# Altium PCB INTEGRATED_PCB.PcbDoc
Units mil, origin at the board's own origin, x right, y up, seen from the top; angles counter-clockwise.
Board outline 1950 x 1790 mil, 4 copper layers (Top Layer, Int1, Int2, Bottom Layer), stack 40.334 mil thick; 97 components, 58 nets, 228 pads, 294 vias.
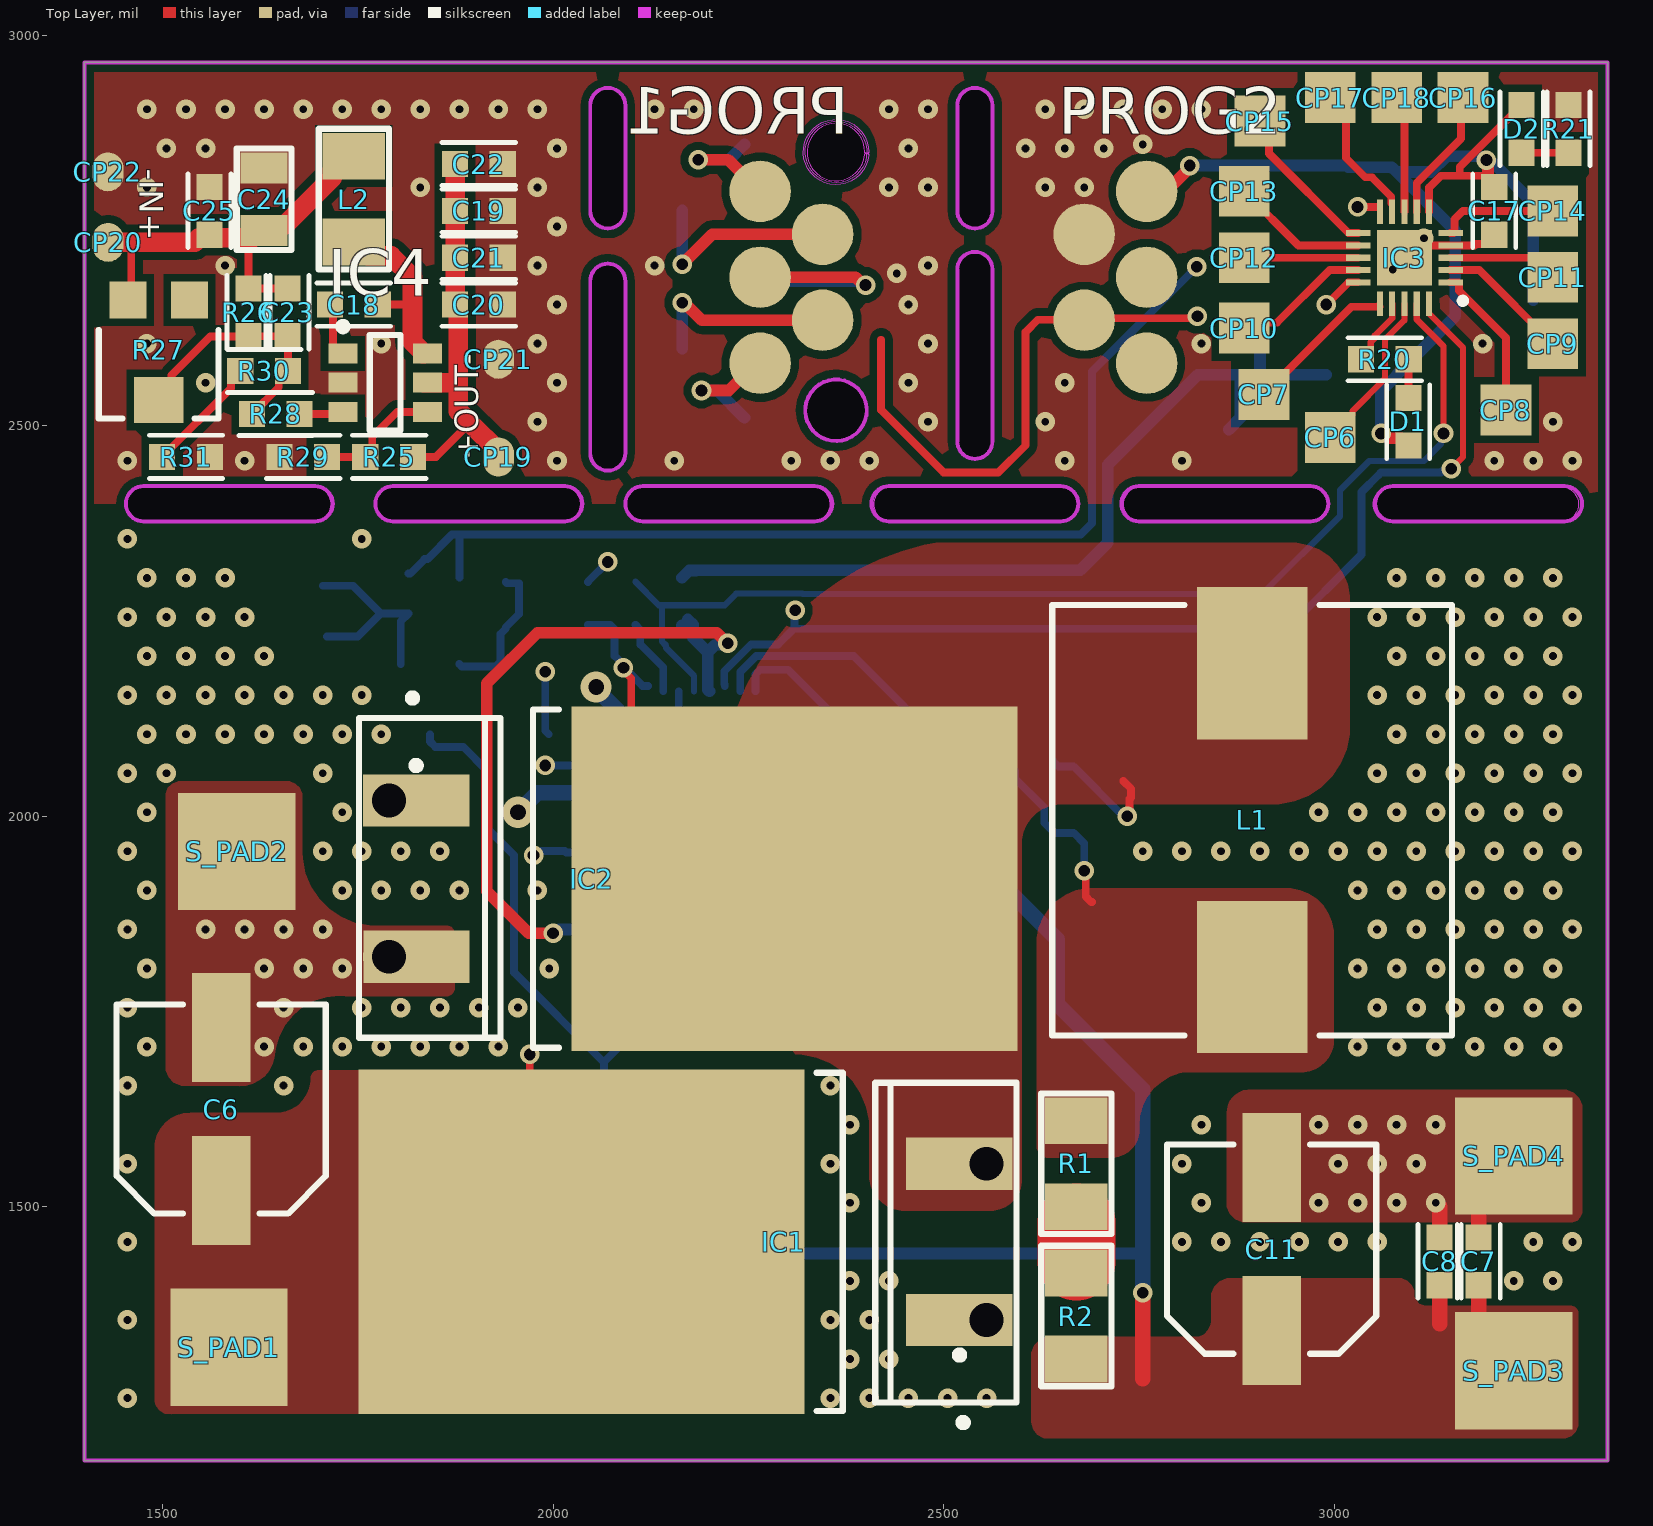
[diagram p0: Top Layer view]
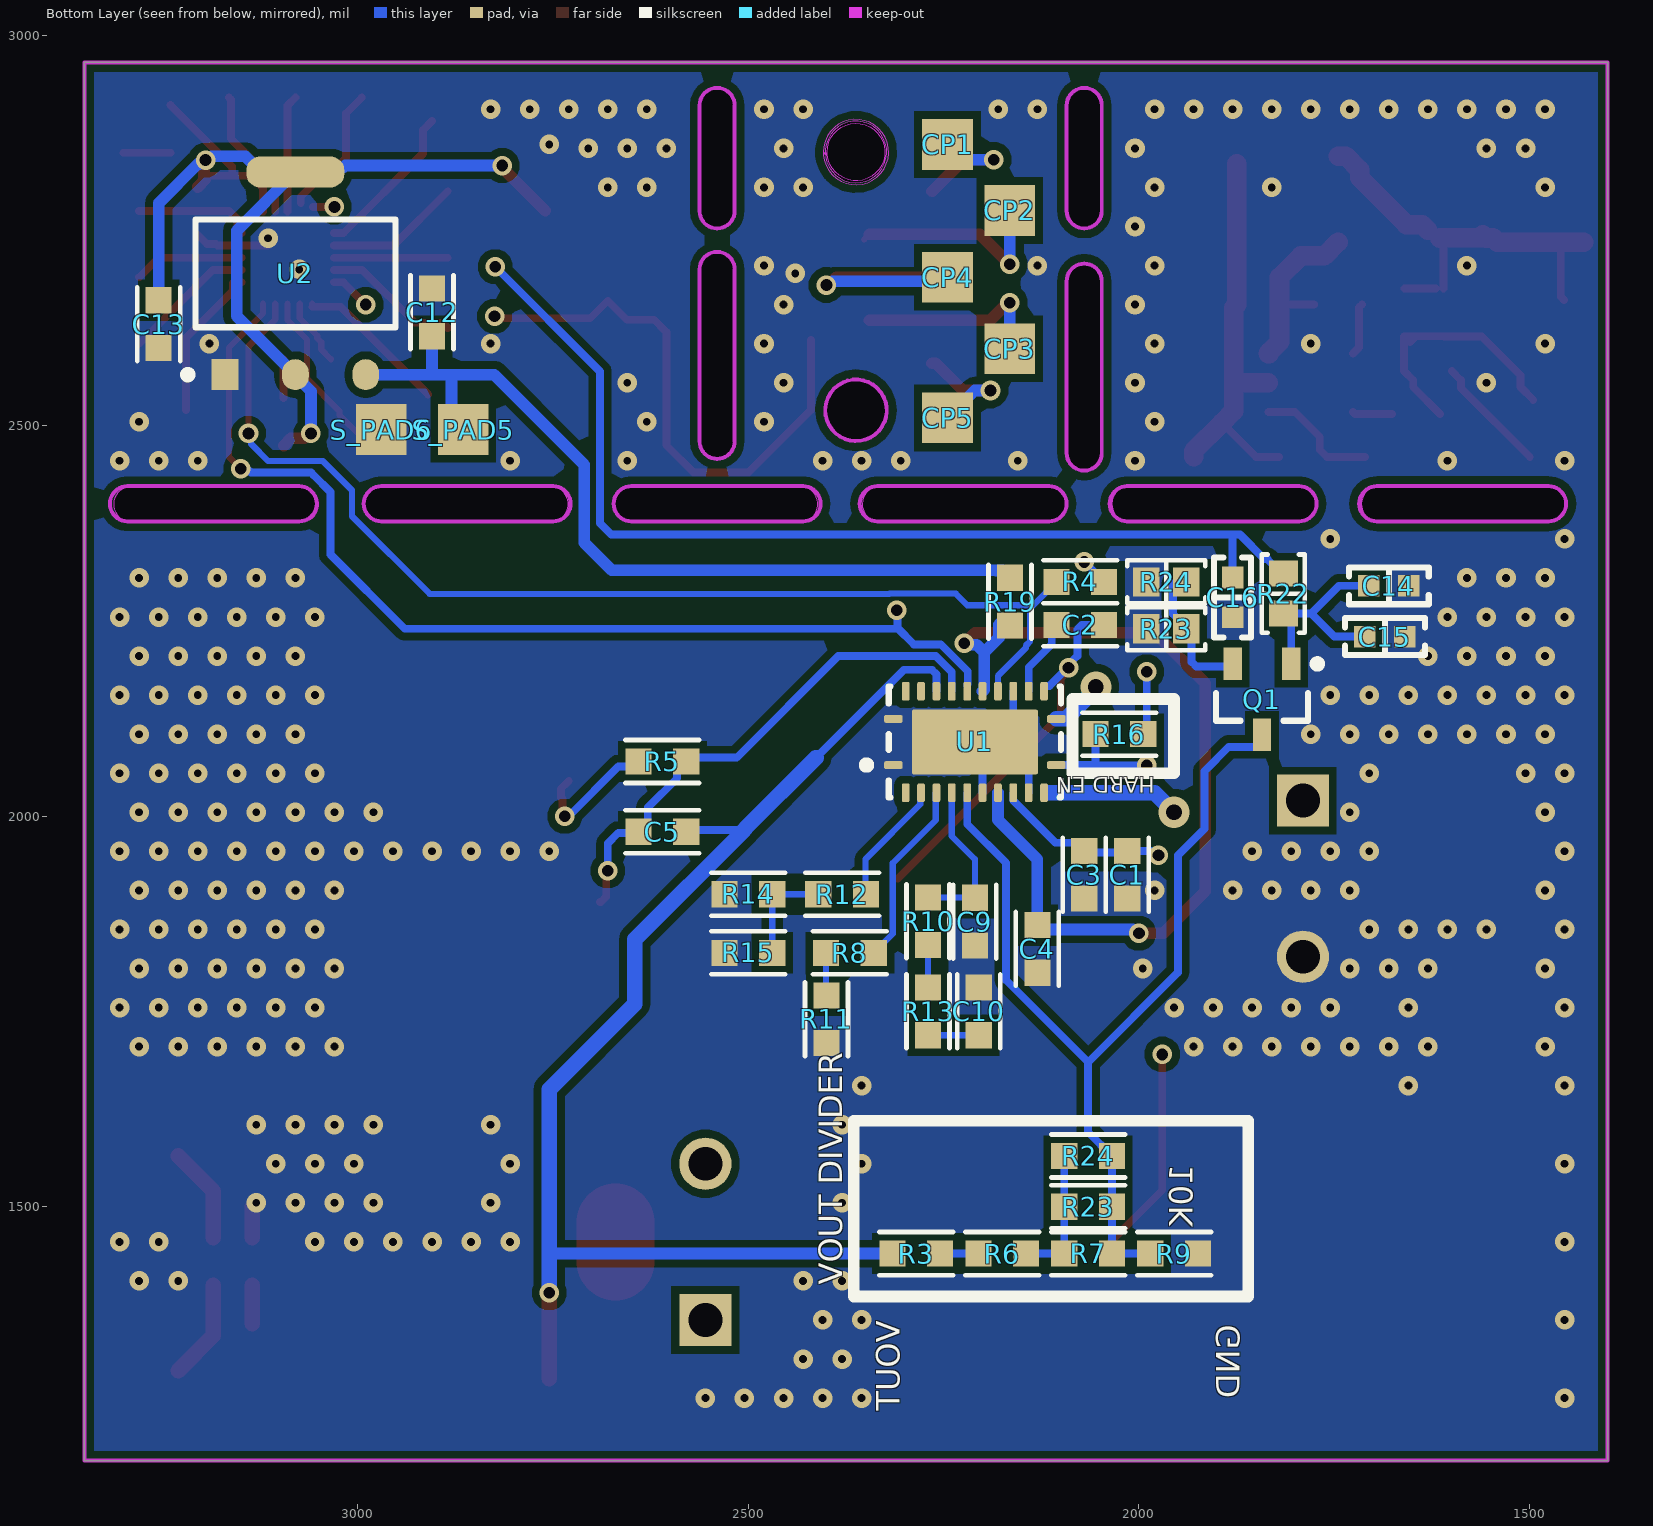
[diagram p1: Bottom Layer view, seen from below]
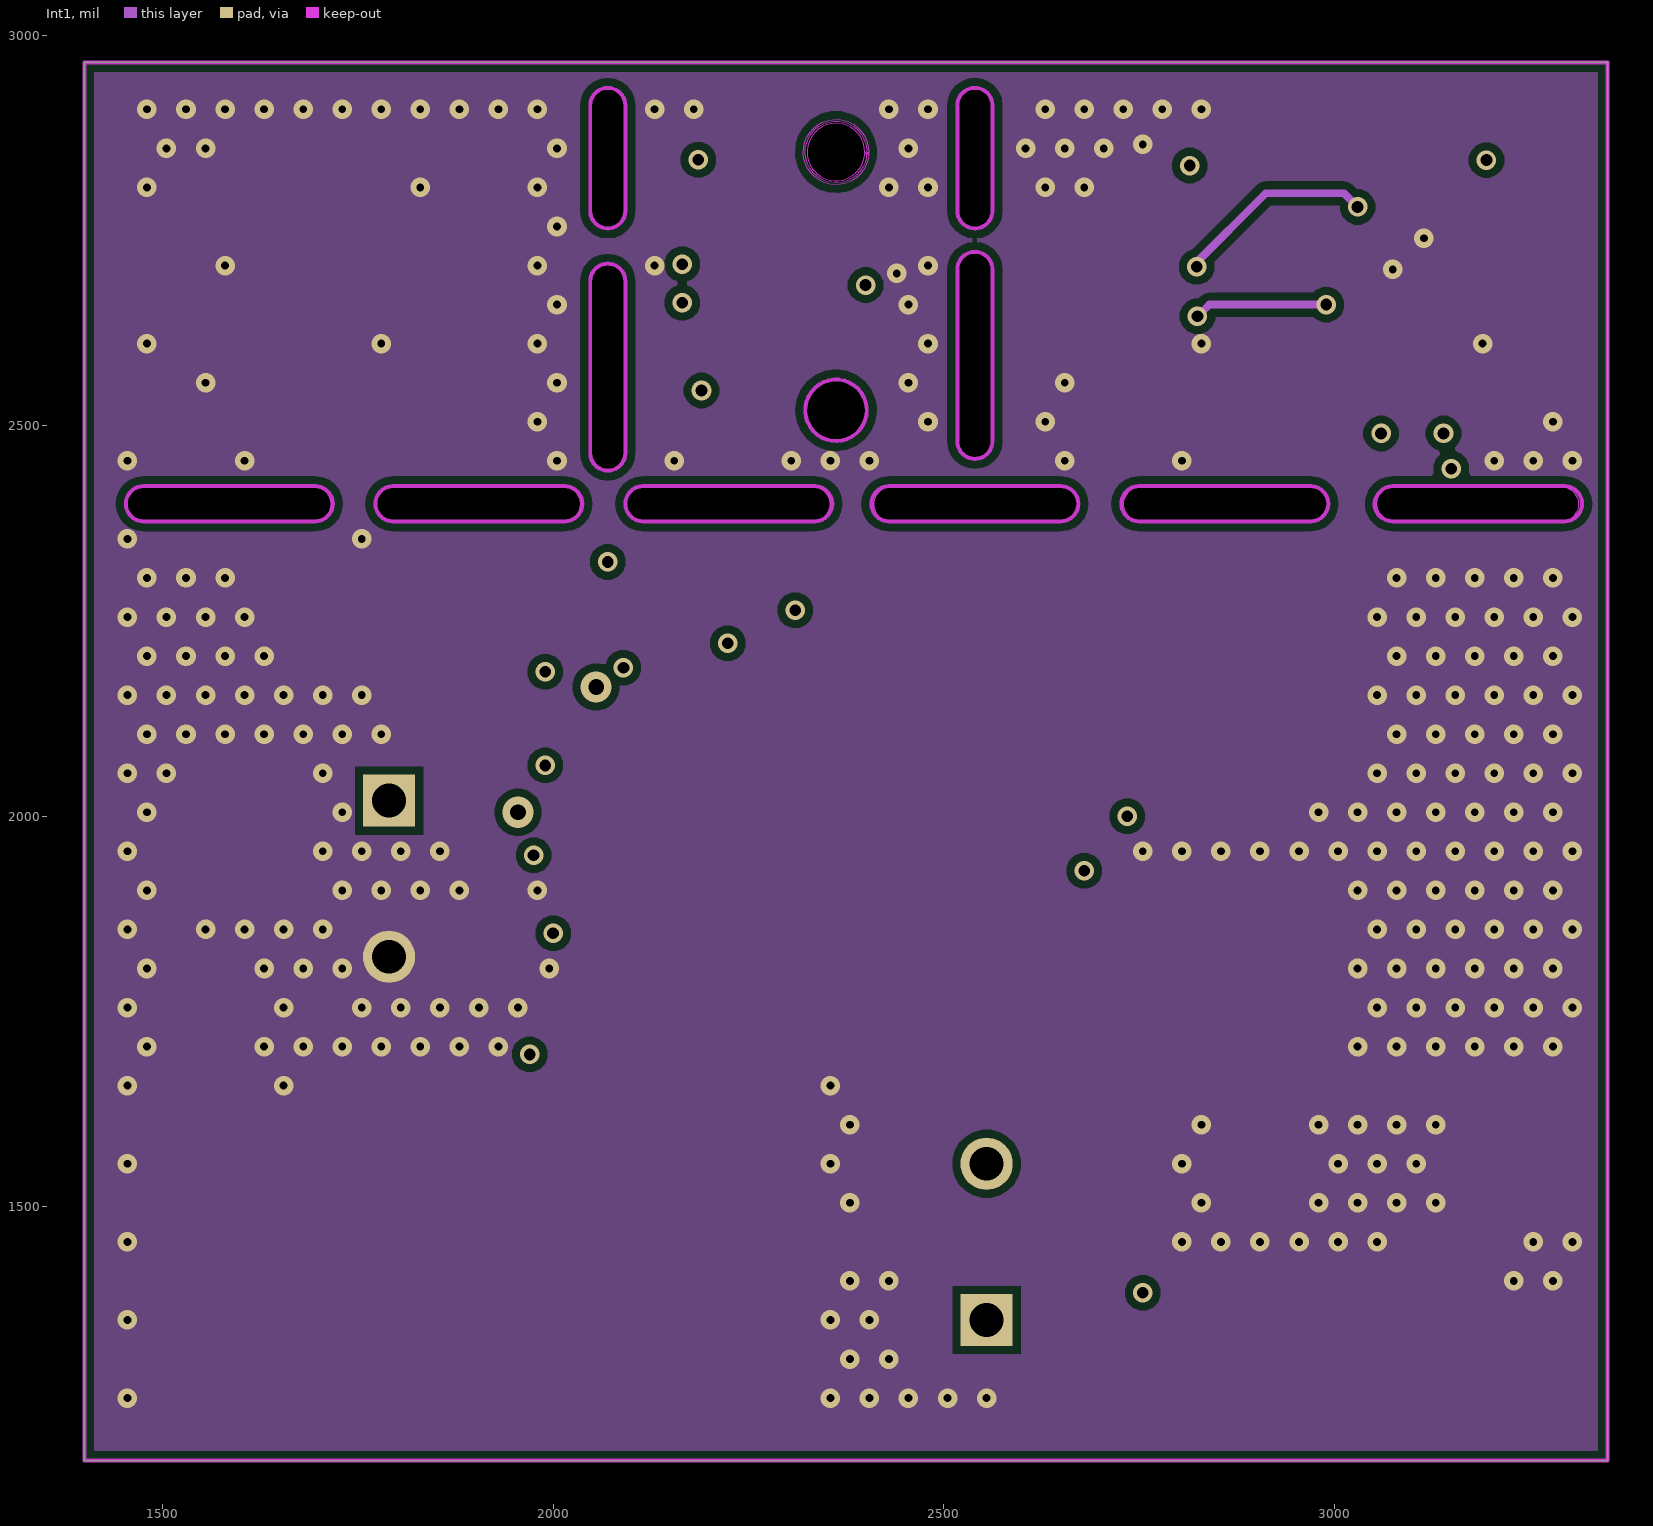
[diagram p2: Int1]
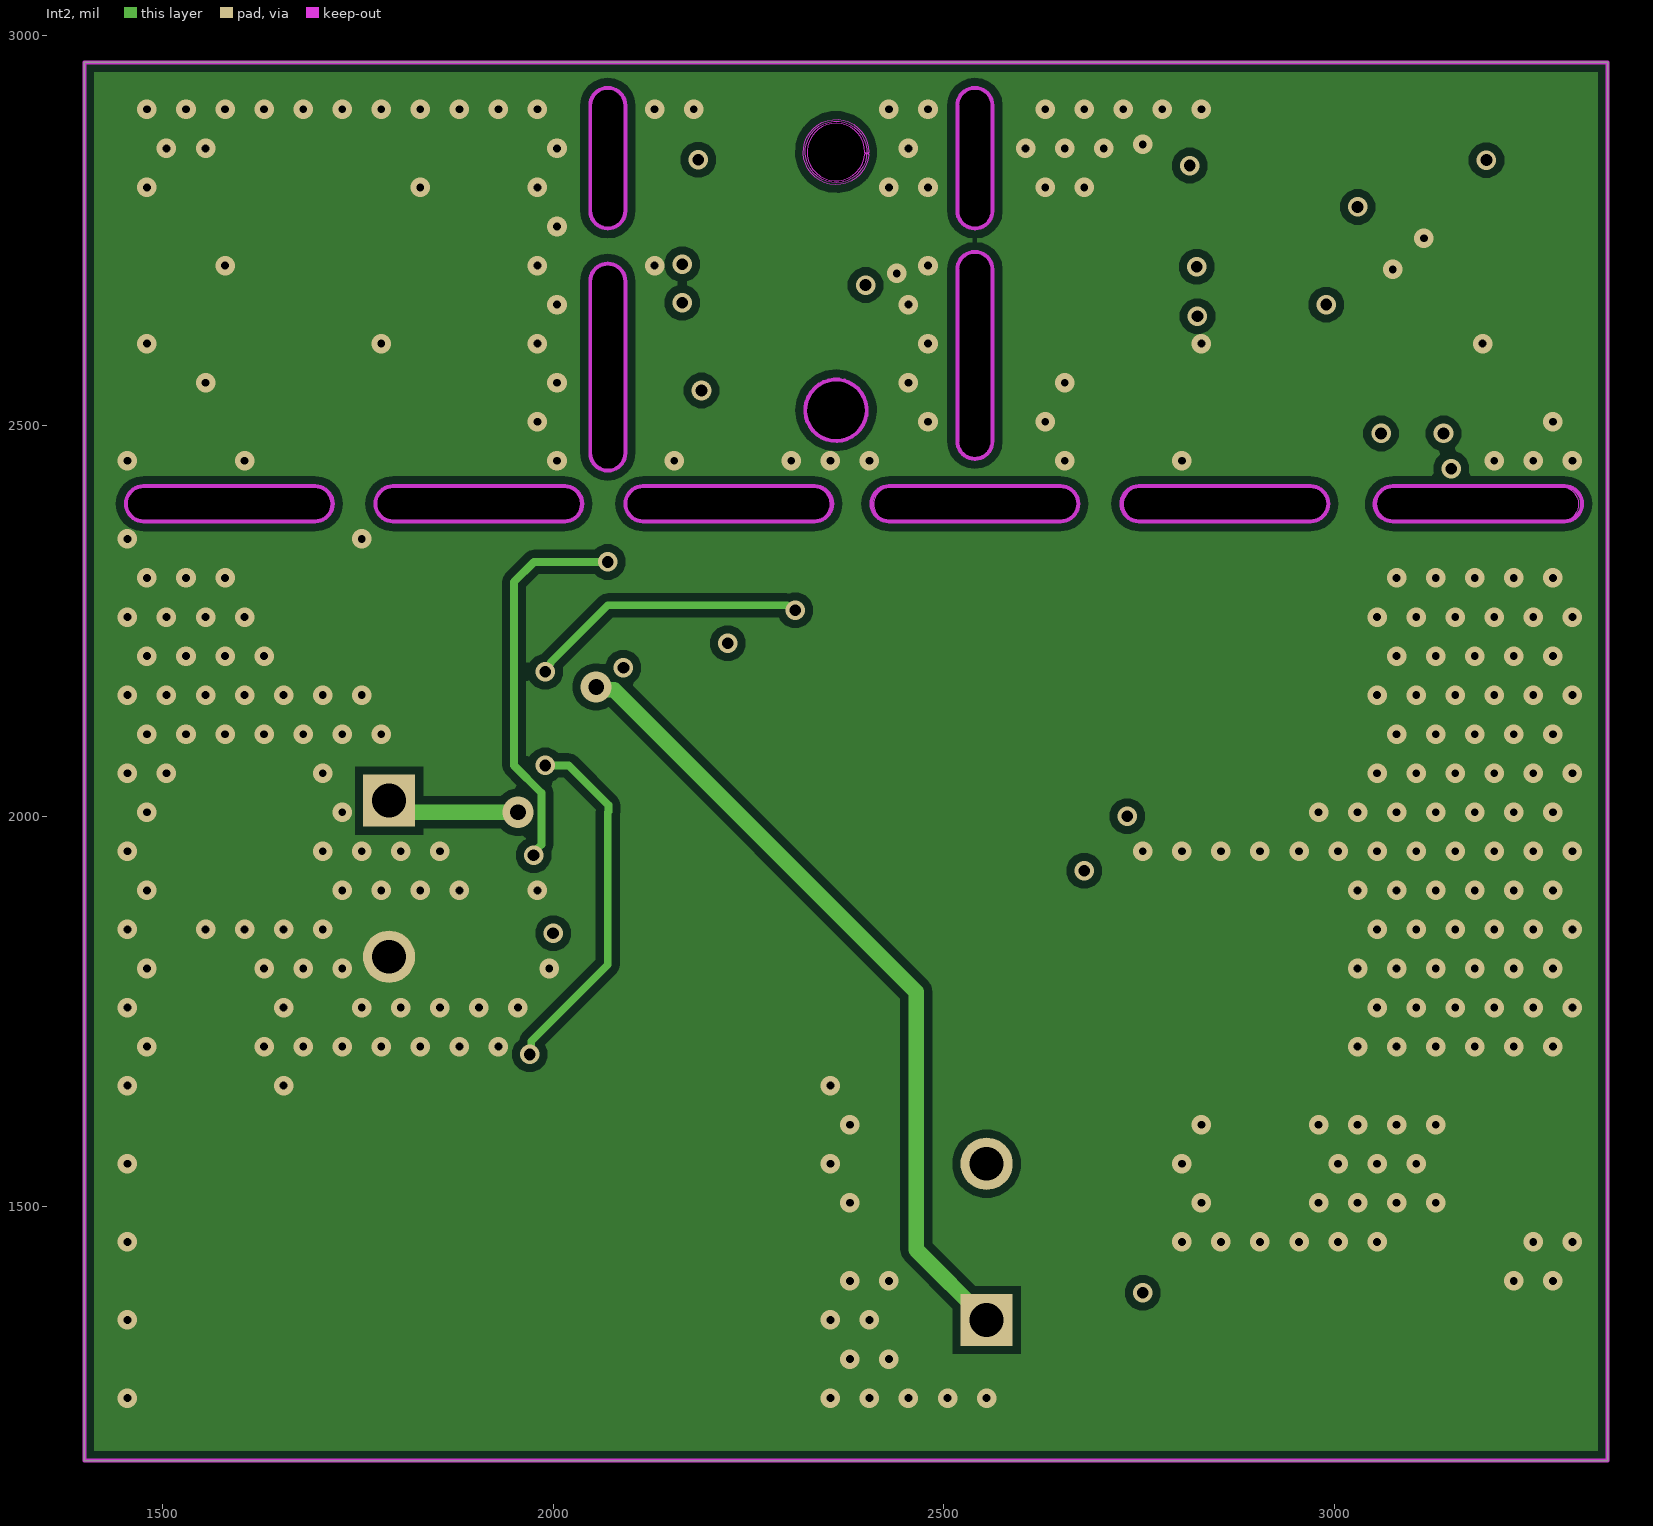
[diagram p3: Int2]
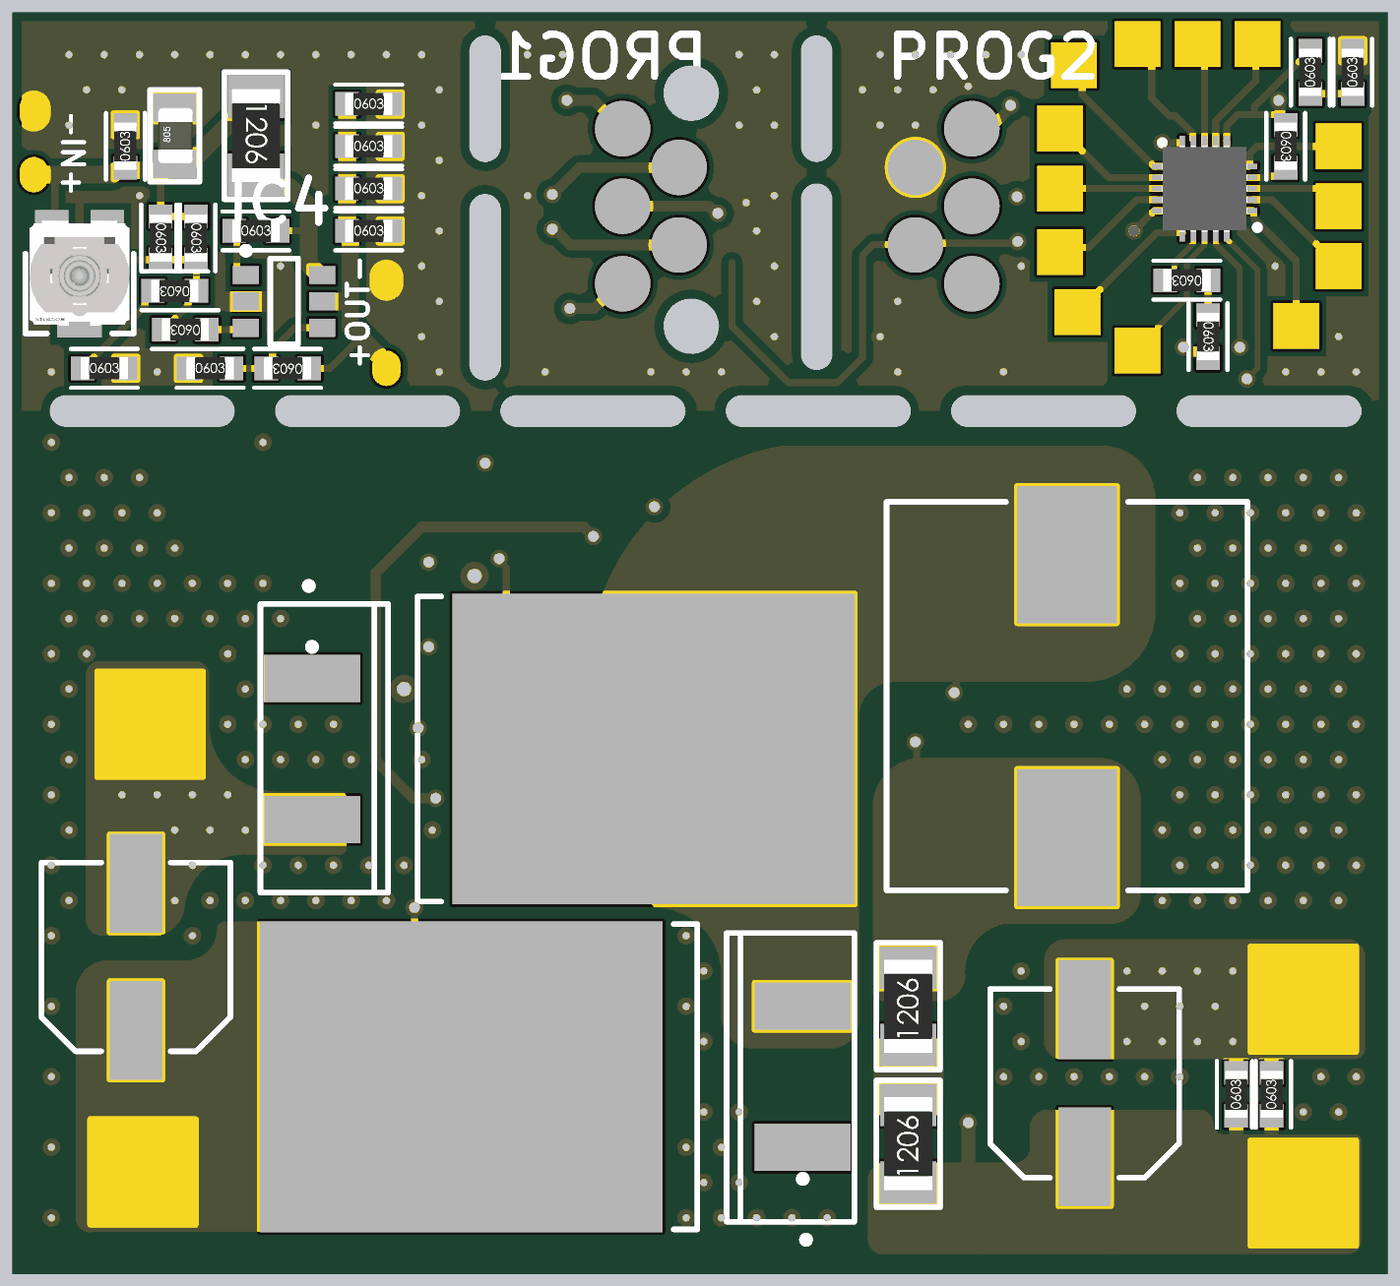
[diagram p4: 3D render of the assembled board from above, using the file's embedded part models]
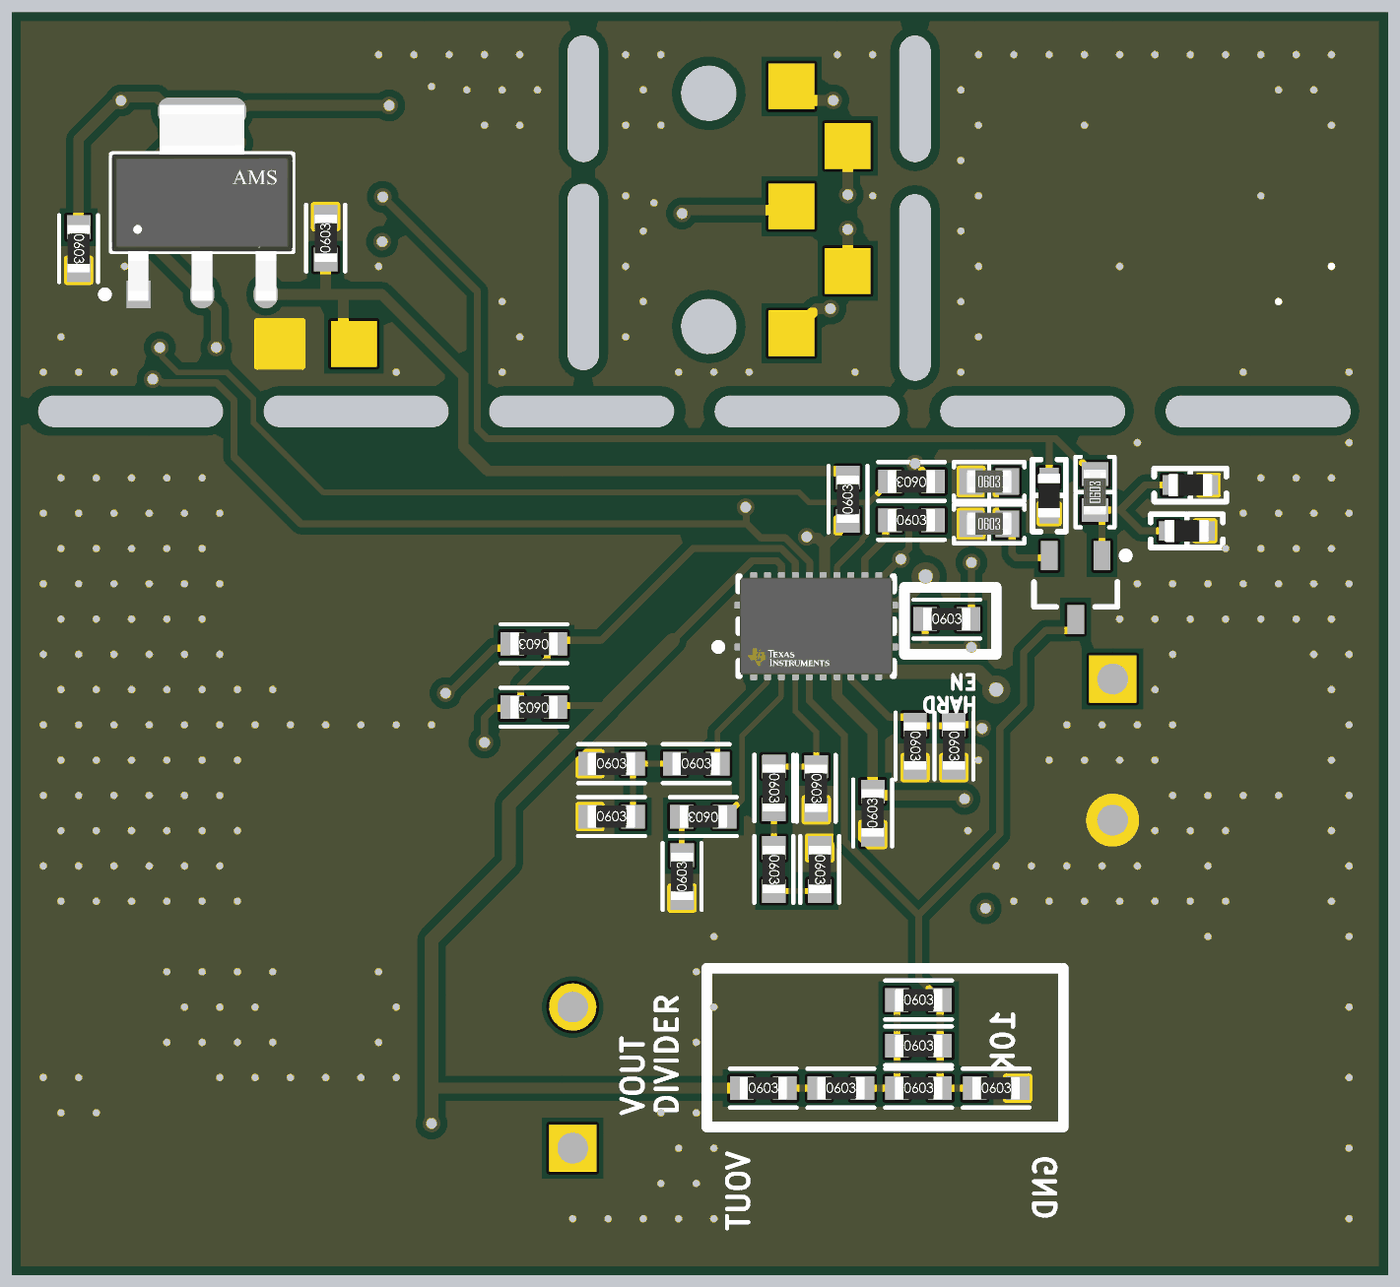
[diagram p5: 3D render of the assembled board from below, using the file's embedded part models]

## Layer stack, top to bottom
Top Solder: solder mask 1, SM-001, Dk 4
Top Layer: signal copper 1.378
Dielectric 1: prepreg 8.26, PP-017, Dk 4.3
Int1: signal copper 0.689
Dielectric 3: core 19.68, Core-039, Dk 4.8
Int2: signal copper 0.689
Dielectric 5: prepreg 8.26, PP-017, Dk 4.3
Bottom Layer: signal copper 1.378
Bottom Solder: solder mask 1, SM-001, Dk 4

## Board outline
1400,1175 1400,2965 3350,2965 3350,1175
cut-out: 2401.57,2850.64 cw(c2362.2,2850.32) 2401.41,2853.88 cw(c2401.41,2853.72) 2401.57,2853.72
cut-out: 2401.57,2520.01 cw(c2362.2,2519.68) 2401.41,2523.25 cw(c2401.41,2523.09) 2401.57,2523.09
cut-out: 2517.5,2910 cw(c2540,2910) 2540,2932.5 cw(c2540,2910) 2562.5,2910 2562.5,2775 cw(c2540,2775) 2540,2752.5 cw(c2540,2775) 2517.5,2775
cut-out: 2517.5,2480 ccw(c2540,2480) 2540,2457.5 ccw(c2540,2480) 2562.5,2480 2562.5,2700 ccw(c2540,2700) 2540,2722.5 ccw(c2540,2700) 2517.5,2700
cut-out: 2070,2752.5 cw(c2070,2775) 2047.5,2775 2047.5,2910 cw(c2070,2910) 2070,2932.5 cw(c2070,2910) 2092.5,2910 2092.5,2775 cw(c2070,2775)
cut-out: 2070,2442.5 cw(c2070,2465) 2047.5,2465 2047.5,2685 cw(c2070,2685) 2070,2707.5 cw(c2070,2685) 2092.5,2685 2092.5,2465 cw(c2070,2465)
cut-out: 1475,2376.98 cw(c1475,2399.48) 1475,2421.98 1690,2421.98 cw(c1692.5,2399.48) 1695,2376.98
cut-out: 1794.5,2376.98 cw(c1794.5,2399.48) 1794.5,2421.98 2009.5,2421.98 cw(c2012,2399.48) 2014.5,2376.98
cut-out: 3072.5,2376.98 cw(c3072.5,2399.48) 3072.5,2421.98 3287.5,2421.98 cw(c3290,2399.48) 3292.5,2376.98
cut-out: 2753,2376.98 cw(c2753,2399.48) 2753,2421.98 2968,2421.98 cw(c2970.5,2399.48) 2973,2376.98
cut-out: 2114,2376.98 cw(c2114,2399.48) 2114,2421.98 2329,2421.98 cw(c2331.5,2399.48) 2334,2376.98
cut-out: 2433.5,2376.98 cw(c2433.5,2399.48) 2433.5,2421.98 2648.5,2421.98 cw(c2651,2399.48) 2653.5,2376.98

## Design rules (kind name [scope] priority, off if disabled: settings)
Clearance [All] p1: gap=10 ignorepadtopadclearanceinfootprint=FALSE except(5: Arc-Arc Arc-Track Arc-SMDPad Arc-THPad Arc-Via Arc-Hole Track-Track Track-SMDPad Track-THPad Track-Via Track-Hole SMDPad-SMDPad SMDPad-THPad SMDPad-Via SMDPad-Hole THPad-THPad THPad-Via THPad-Hole Via-Hole Fill-Hole Poly-Hole Region-Hole Text-Hole)
MinimumSolderMaskSliver [All] p1: minsoldermaskwidth=4
PolygonConnect PolygonConnect_1 [(InNet('GND') AND HasFootprint('PCBCOMPONENT_1'))] p1: connectstyle=Relief reliefconductorwidth=20 reliefentries=4 polygonreliefangle="90 Angle" airgapwidth=10
PolygonConnect [All] p2: connectstyle=Direct reliefconductorwidth=10 reliefentries=4 polygonreliefangle="90 Angle" airgapwidth=10
RoutingVias [All] p1: holewidth=15 width=18 viastyle="Through Hole" minholewidth=12 minwidth=16 maxholewidth=40 maxwidth=50
SilkToSilkClearance [All] p1: silktosilkclearance=2
SilkToSolderMaskClearance [IsPad] p1: minsilkscreentomaskgap=4 clearancetoexposedcopper=TRUE
SolderMaskExpansion [All] p1: expansion=4 istentingtop=FALSE
SupplyNets "Schematic Supply Nets_3" [InNet('3V3')] p1: voltage=0.000
SupplyNets "Schematic Supply Nets_2" [InNet('VOUT')] p2: voltage=0.000
SupplyNets "Schematic Supply Nets_1" [InNet('VIN')] p3: voltage=0.000
SupplyNets "Schematic Supply Nets" [InNet('GND')] p4: voltage=0.000
UnRoutedNet [All] p1: checkbadconnections=TRUE
Width [All] p1: maxlimit=200 minlimit=5 preferedwidth=10 minimp=50.000000 maximp=50.000000 favimp=50.000000
26 further rules are at their usual default settings.

## Classes and differential pairs
component class Designator: C18 C19 C20 C21 C22 C23 C24 C25 CP19 CP20 CP21 CP22 IC2 L2 R25 R26 R27 R28 R29 R30 R31
component class controller: C12 C13 C14 C15 C16 C17 CP1 CP2 CP3 CP4 CP5 CP6 CP7 CP8 CP9 CP10 CP11 CP12 CP13 CP14 CP15 CP16 CP17 CP18 D1 D2 IC1 PROG1 PROG2 Q1 R20 R21 R22 R23 R24 S_PAD5 S_PAD6 U2
component class COMBINED: R19
component class converter: C1 C2 C3 C4 C5 C6 C7 C8 C9 C10 C11 IC1 IC2 L1 R1 R2 R3 R4 R5 R6 R7 R8 R9 R10 R11 R12 R13 R14 R15 R16 R23 R24 S_PAD1 S_PAD2 S_PAD3 S_PAD4 U1

## Components (designator, comment, footprint, x,y, rotation, side; value= is the part's Value field where it differs from the comment)
C1 "Capacitor" SMD-0603-RES 2015,1925 r0 bottom value=1uF
C2 "Capacitor" SMD-0603-RES 2075,2245 r270 bottom value=1p
C3 "Capacitor" SMD-0603-RES 2070,1925 r0 bottom value=1uF
C4 "Capacitor" SMD-0603-RES 2130,1830 r180 bottom value=100nF
C5 "Capacitor" SMD-0603-RES 2610,1980 r90 bottom value=1p
C6 "150uF" CAPAE7266X80M 1575,1625 r90 top
C7 "Capacitor" SMD-0603-RES 3185,1430 r0 top value=10uF
C8 "Capacitor" SMD-0603-RES 3135,1430 r0 top value=10uF
C9 "Capacitor" SMD-0603-RES 2210,1865 r0 bottom value=56pF
C10 "Capacitor" SMD-0603-RES 2205,1750 r0 bottom value=2.2nF
C11 "150uF" CAPAE7266X80M 2920,1445.67 r90 top
C12 "Capacitor" SMD-0603-RES 2905,2645 r180 bottom value=10uF
C13 "Capacitor" SMD-0603-RES 3255,2630 r0 bottom value=10uF
C14 "Capacitor" "CAP FILM 0603_1608" 1680,2295 r0 bottom value=100n
C15 "Capacitor" "CAP FILM 0603_1608" 1685,2230 r0 bottom value=1u
C16 "Capacitor" "CAP FILM 0603_1608" 1880,2280 r90 bottom value=100n
C17 "Capacitor" SMD-0603-RES 3205,2775 r180 top value=10uF
C18 "Capacitor" SMD-0603-RES 1745,2655 r270 top value=100n
C19 "Capacitor" SMD-0603-RES 1905,2775 r270 top value=10uF
C20 "Capacitor" SMD-0603-RES 1905,2655 r270 top value=10uF
C21 "Capacitor" SMD-0603-RES 1905,2715 r270 top value=10uF
C22 "Capacitor" SMD-0603-RES 1905,2835 r270 top value=10uF
C23 "Capacitor" SMD-0603-RES 1660,2645 r180 top value=10pF
C24 "Capacitor" SMD-0805-RES 1630,2790 r0 top value=47uF
C25 "Capacitor" SMD-0603-RES 1560,2775 r0 top value=100nF
CP1 "CONNECT_PAD" PAD_SQUARE 2245,2860 r90 bottom
CP2 "CONNECT_PAD" PAD_SQUARE 2165.35,2775.59 r90 bottom
CP3 "CONNECT_PAD" PAD_SQUARE 2165.35,2598.43 r90 bottom
CP4 "CONNECT_PAD" PAD_SQUARE 2245,2690 r270 bottom
CP5 "CONNECT_PAD" PAD_SQUARE 2245,2510 r180 bottom
CP6 "CONNECT_PAD" PAD_SQUARE 2995,2485 r0 top
CP7 "CONNECT_PAD" PAD_SQUARE 2910,2540 r90 top
CP8 "CONNECT_PAD" PAD_SQUARE 3220,2520 r90 top
CP9 "CONNECT_PAD" PAD_SQUARE 3280,2605 r90 top
CP10 "CONNECT_PAD" PAD_SQUARE 2885,2625 r90 top
CP11 "CONNECT_PAD" PAD_SQUARE 3280,2690 r90 top
CP12 "CONNECT_PAD" PAD_SQUARE 2885,2715 r90 top
CP13 "CONNECT_PAD" PAD_SQUARE 2885,2800 r90 top
CP14 "CONNECT_PAD" PAD_SQUARE 3280,2775 r90 top
CP15 "CONNECT_PAD" PAD_SQUARE 2905,2890 r90 top
CP16 "CONNECT_PAD" PAD_SQUARE 3165,2920 r90 top
CP17 "CONNECT_PAD" PAD_SQUARE 2995,2920 r90 top
CP18 "CONNECT_PAD" PAD_SQUARE 3080,2920 r90 top
CP19 "CONNECT_PAD" ROUND_SMALL 1930,2460 r180 top
CP20 "CONNECT_PAD" ROUND_SMALL 1430.26,2734.74 r0 top
CP21 "CONNECT_PAD" ROUND_SMALL 1930,2585 r0 top
CP22 "CONNECT_PAD" ROUND_SMALL 1430,2825 r180 top
D1 "Light-Emitting Diode" SMD-0603-RES 3095,2505 r180 top
D2 "Light-Emitting Diode" SMD-0603-RES 3240,2880 r0 top
IC1 "MOSFET N-CH SOT-23-3" DPAK228P1975X238-3N 2170,1455 r180 top
IC2 "MOSFET N-CH SOT-23-3" DPAK228P1975X238-3N 2175,1920 r0 top
IC3 "CH32V003F4U6" QFN40P300X300X80-21N-D 3090,2715 r180 top
IC4 "Component_1" SOT95P280X130-6N 1785,2555 r0 top
L1 "Inductor" INDP135127X65N 2895,1995 r270 top value=1.5uH
L2 "Cybermax CMLO252010F1R5MTT" SMD-1206-RES 1745,2790 r180 top value=1.5uH
PROG1 "Component_1" programming_pad#1 2265,2690 r180 top
PROG2 "Component_1" programming_pad#2 2760,2690 r0 top
Q1 "BSS806N" INF-PG-SOT23_N 1842.4,2149.72 r270 bottom
R1 "Resistor" SMD-1206-RES 2670,1555 r0 top value=R001
R2 "Resistor" SMD-1206-RES 2670,1360 r0 top value=R001
R3 "Resistor" SMD-0603-RES 2285,1440 r270 bottom value=10K
R4 "Resistor" SMD-0603-RES 2075,2300 r90 bottom value=100K
R5 "Resistor" SMD-0603-RES 2610,2070 r90 bottom value=1K
R6 "Resistor" SMD-0603-RES 2175,1440 r270 bottom value=47K
R7 "Resistor" SMD-0603-RES 2065,1440 r270 bottom value=22K
R8 "Resistor" SMD-0603-RES 2370,1825 r90 bottom value=22K
R9 "Resistor" SMD-0603-RES 1955,1440 r270 bottom value=10K
R10 "Resistor" SMD-0603-RES 2270,1865.51 r0 bottom value=1K
R11 "Resistor" SMD-0603-RES 2400,1740 r180 bottom value=10K
R12 "Resistor" SMD-0603-RES 2380,1900 r270 bottom value=1K
R13 "Resistor" SMD-0603-RES 2270,1750 r0 bottom value=5K1
R14 "Resistor" SMD-0603-RES 2500,1900 r270 bottom value=1K
R15 "Resistor" SMD-0603-RES 2500,1825 r270 bottom value=1K
R16 "Resistor" SMD-0603-RES 2025,2105 r270 bottom value=10K
R19 "Resistor" SMD-0603-RES 2165,2274.78 r180 bottom value=0R
R20 "Resistor" SMD-0603-RES 3065,2585 r90 top value=100R
R21 "Resistor" SMD-0603-RES 3300,2880 r0 top value=100R
R22 "Resistor" "RES 0603_1608" 1815,2285 r90 bottom value=470R
R23 "Resistor" SMD-0603-RES 2065,1500 r270 bottom value=OPEN
R23 "Resistor" "RES 0603_1608" 1965,2240 r180 bottom value=OPEN
R24 "Resistor" SMD-0603-RES 2065,1565 r270 bottom value=OPEN
R24 "Resistor" "RES 0603_1608" 1965,2300 r180 bottom value=360R
R25 "Resistor" SMD-0603-RES 1790,2460 r90 top value=300K
R26 "Resistor" SMD-0603-RES 1610,2645 r180 top value=47K
R27 "TC33X-2-104E" FP-TC33X-2-MFG 1495,2595 r180 top
R28 "Resistor" SMD-0603-RES 1645,2515 r90 top value=10K
R29 "Resistor" SMD-0603-RES 1680,2460 r270 top value=100K
R30 "Resistor" SMD-0603-RES 1630,2570 r90 top value=10k
R31 "Resistor" SMD-0603-RES 1530,2460 r270 top value=0R
S_PAD1 "SOLDER_PAD" POWER_PAD 1585,1320 r90 top
S_PAD2 "SOLDER_PAD" POWER_PAD 1595,1955 r90 top
S_PAD3 "SOLDER_PAD" POWER_PAD 3230,1290 r90 top
S_PAD4 "SOLDER_PAD" POWER_PAD 3230,1565 r90 top
S_PAD5 "SOLDER_PAD" PAD_SQUARE 2865,2495 r90 bottom
S_PAD6 "SOLDER_PAD" PAD_SQUARE 2970,2495 r90 bottom
U1 "" FP-RGY0024E-MFG 2210,2095 r90 bottom
U2 "AMS1117-3.3" FP-AMS1117-IPC_C 3080,2695 r90 bottom

## Footprints (in the part's own frame and the unit in brackets; to place one, negate y for a bottom-side part, rotate by r counter-clockwise, add the part's x,y. Pads: shape width x height; smd on the part's side, far side on the other; paste and mask are expansions set on the pad)
"CAP FILM 0603_1608" [mm] "Chip Capacitor, 2-Leads, Body 1.60x0.80mm, IPC Medium Density"
  rect 0.7x0.7 smd: 1(-0.65,0) 2(0.65,0)
  silkscreen extent -1.3,-0.6 1.3,0.6, body extent -0.8,-0.4 0.8,0.4, height 0.7
CAPAE7266X80M [mm] "Aluminum Electrolytic Capacitor, Body 6.60x6.60x8.00mm, IPC Low Density"
  rect 3.55x1.9 smd: 1(-2.65,0) 2(2.65,0)
  silkscreen extent -3.4,-3.4 3.4,3.4, body extent -3.4,-3.4 3.4,3.4, height 8
DPAK228P1975X238-3N [mm] "D3-PAK, 3-Pads, Body 7.60x8.86mm (max), IPC Medium Density"
  rect 1.7x1.7 hole 1.1: 1(-9.779,2.54)
  rect 3.45x1.7 smd: 1(-8.89,2.54) 3(-8.89,-2.54)
  rect 14.5x11.2 smd: 2(3.4,0)
  round 1.7 hole 1.1: 3(-9.779,-2.54)
  silkscreen extent -10.76,-5.5 -4.25,6, body extent -9.31,-5.5 3.9,5.5, height 19.68
FP-AMS1117-IPC_C [mm]
  rect 1.004x0.872 smd paste+0 mask+0: 1(-3.295,2.29)
  rrect100% 1.004x0.872 smd paste+0 mask+0: 2(-3.295,0) 3(-3.295,-2.29)
  rrect87% 1.004x3.182 smd paste+0 mask+0: 4(3.295,0)
  silkscreen extent -3.42,-3.25 1.75,3.63, body extent -3.53,-3.25 3.53,3.25, height 1.8
FP-RGY0024E-MFG [mm]
  rrect40% 0.25x0.6 smd paste+0 mask+0: 1(-0.75,2.65) 12(-0.75,-2.65) 13(0.75,-2.65) 24(0.75,2.65)
  rrect40% 0.6x0.25 smd paste+0 mask+0: 2(-1.65,2.25) 3(-1.65,1.75) 4(-1.65,1.25) 5(-1.65,0.75) 6(-1.65,0.25) 7(-1.65,-0.25) 8(-1.65,-0.75) 9(-1.65,-1.25) 10(-1.65,-1.75) 11(-1.65,-2.25) 14(1.65,-2.25) 15(1.65,-1.75) 16(1.65,-1.25) 17(1.65,-0.75) 18(1.65,-0.25) 19(1.65,0.25) 20(1.65,0.75) 21(1.65,1.25) 22(1.65,1.75) 23(1.65,2.25)
  rrect5% 2.1x4.1 smd paste-1000 mask+0: 25(0,0)
  silkscreen extent -1.8,-2.8 1.8,3.65, body extent -1.75,-2.75 1.75,2.75, height 1
FP-TC33X-2-MFG [mm]
  rect 1.2x1.2 smd paste+0 mask+0: 1(-1,-1.675) 3(1,-1.675)
  rect 1.6x1.5 smd paste+0 mask+0: 2(0,1.575)
  silkscreen extent -1.95,-0.7 1.95,2.17, body extent -2.05,-2.37 2.05,2.42, height 0.25
INDP135127X65N [mm] "Precision Wire Wound Inductor, 2-Leads, Body 13.50x12.70mm, IPC Medium Density"
  rect 4.95x3.6 smd: 1(-5.1,0) 2(5.1,0)
  silkscreen extent -7,-6.5 7,6.5, body extent -7,-6.5 7,6.5, height 6.5
INF-PG-SOT23_N [mm] "SOT23, 3-Leads, Body 2.9x1.3mm, Pitch 0.95mm, IPC Medium Density"
  rect 1.05x0.6 smd: 1(-1.15,0.95) 2(-1.15,-0.95) 3(1.15,0)
  silkscreen extent -1.27,-1.5 0.7,1.92, body extent -0.7,-1.5 0.7,1.5, height 1.1
PAD_SQUARE [mil]
  rect 65x65 smd paste-99999: 1(0,0)
POWER_PAD [mil]
  rect 150x150 smd paste-99999: 1(0,0)
programming_pad#1 [mm]
  round 2 smd: 1(0,-2.794) 2(-2.032,-1.397) 3(0,0) 4(-2.032,1.397) 5(0,2.794)
programming_pad#2 [mm]
  round 2 smd: 1(0,2.794) 2(-2.032,1.397) 3(0,0) 4(-2.032,-1.397) 5(0,-2.794)
QFN40P300X300X80-21N-D [mm]
  rect 0.8x0.2 smd: 1(-1.5,0.8) 2(-1.5,0.4) 3(-1.5,0) 4(-1.5,-0.4) 5(-1.5,-0.8) 11(1.5,-0.8) 12(1.5,-0.4) 13(1.5,0) 14(1.5,0.4) 15(1.5,0.8)
  rect 0.2x0.8 smd: 6(-0.8,-1.5) 7(-0.4,-1.5) 8(0,-1.5) 9(0.4,-1.5) 10(0.8,-1.5) 16(0.8,1.5) 17(0.4,1.5) 18(0,1.5) 19(-0.4,1.5) 20(-0.8,1.5)
  rect 1.8x1.8 smd: 21(0,0)
  silkscreen extent -2,1.3 -1.8,1.5, body extent -1.55,-1.55 1.55,1.55, height 0.8
"RES 0603_1608" [mm] "Chip Resistor, 2-Leads, Body 1.60x0.80mm, IPC Medium Density"
  rect 0.85x0.95 smd: 1(-0.65,0) 2(0.65,0)
  silkscreen extent -1.27,-0.7 1.27,0.7, body extent -0.8,-0.4 0.8,0.4, height 0.45
ROUND_SMALL [mil]
  oval 40x50 smd paste-99999: 1(0,0)
SMD-0603-RES [mm]
  rect 0.85x0.85 smd: 1(0,0.775) 2(0,-0.775)
  silkscreen extent -0.7,-1.2 0.7,1.2, body extent -0.4,-0.85 0.4,0.85, height 0.56
SMD-0805-RES [mil]
  rect 60x40 smd: 1(0,40) 2(0,-40)
  silkscreen extent -35,-65 35,65, body extent -24,-39 26,39, height 31
SMD-1206-RES [mil]
  rect 80x60 smd: 1(0,55) 2(0,-55)
  silkscreen extent -45,-90 45,90, body extent -34,-66 34,66, height 33
SOT95P280X130-6N [mm] "SOT23, 6-Leads, Body 2.90x2.80mm, Pitch 0.95mm, IPC Medium Density"
  rect 0.95x0.65 smd: 1(-1.375,0.95) 2(-1.375,0) 3(-1.375,-0.95) 4(1.375,-0.95) 5(1.375,0) 6(1.375,0.95)
  silkscreen extent -1.5,-1.55 0.5,1.95, body extent -0.9,-1.55 0.9,1.55, height 1.3

## Part data
C6 C11: library part "Polarised Capacitor", "SMT Polarised Capacitor"
D1 D2: library part LED, AF=1, BV=0, BV_MAX=1e99, CJO=0, CJP=0, CTA=0, CTP=0, EG=1.11, FC=0.5, FCS=0.5, FV_MAX=1e99, IBV=0.001, IKF=0, IKR=0, IS=1e-14, ISR=1e-14, JSW=0, JTUN=0, JTUNSW=0, KEG=1, KF=0, LEVEL=1, MJSW=0.33, N=1, NBV=1, NR=1, NS=1, NTUN=30, PHP=1, RS=0, SimulationGenericComponent=True, TCV=0, TLEV=0, TLEVC=0, TM1=0, TM2=0, TNOM=27, TPB=0, TPHP=0, TRS=0, TRS2=0, TT=0, TTT1=0, TTT2=0, VJ=1, XTI=3, XTITUN=3
IC1 IC2: library part "DIODES INC MOSFET N-CH SOT-23-3"
IC3: "Integrated Circuit", Manufacturer_Name=WCH, Datasheet Link=https://www.lcsc.com/datasheet/lcsc_datasheet_2409280202_WCH-Jiangsu-Qin-Heng-CH32V003F4U6_C5299908.pdf, Height=0.8mm, Manufacturer_Part_Number=CH32V003F4U6
L1: "DMBJ CXP1040-1R5M-AG(1.5uh)", SimulationGenericComponent=True
L2: library part Inductor, "Inductor", SimulationGenericComponent=True
Q1: library part CMP-1149-00036-1, "N-Channel OptiMOS 2 Small-Signal-Transistor, 20 V VDS, 2.3 A ID, -55 to 150 degC, PG-SOT23, Reel, Green", Manufacturer=Infineon, ComponentLink1Description="Manufacturer URL", ComponentLink1URL=http://www.infineon.com/, ComponentLink2Description=Datasheet, ComponentLink2URL=http://www.infineon.com/dgdl/BSS806N_Rev2.3_.pdf?folderId=db3a3043156fd573011622e10b5c1f67&fileId=db3a304330f686060131185f0553451c, ComponentLink3Description="Package Specification", ComponentLink3URL=http://www.infineon.com/dgdl/SOT23-Package_Overview.pdf?folderId=db3a30431936bc4b0119532290053c66&fileId=db3a30431936bc4b0119533468123c85, DatasheetVersion="Rev. 2.3", Green=TRUE, Halogen-free=TRUE, ID (max)="2.3Â A", IDpuls (max)="9.3Â A", Mounting Technology="Surface Mount", PackageDescription="3-Pin Small Outline Transistor Package, 2.9 x 1.3 mm Body, 0.95 mm Pitch", PackageReference=PG-SOT23, PackageVersion=Apr-08, Packing=Reel, PartNumber=BSS806N, Ptot (max)="0.5Â W", QG="1.7Â nC", RDS (on) (max)="57 mOhm", RDS (on) (max) (@1.8V)="82 mOhm", RDS (on) (max) (@2.5V)="57 mOhm", RthJA (max)="250 K/W", VDS (max)="20 V", VGS(th) (max)="0.75Â V", VGS(th) (min)="0.3Â V"
R1 R2: "1mOhm current sense", SimulationGenericComponent=True, TC1=0, TC2=0
R27: library part CMP-07234-000040-1, "TRIMMER 100K OHM 0.1W J LEAD TOP", Color=Silver, Max Operating Temperature=100°C, Max Power Dissipation=100mW, Min Operating Temperature=-40°C, Package Quantity=2500, Resistance=100K, Resistance Tolerance=25%, Resistor Type=Carbon, Temperature Coefficient=250ppm/°C, Voltage Rating (DC)=50V, Depth=3.8mm, Height=0.047inch, Length=3mm, Military Standard=Not, Mount="Surface Mount", Number of Turns=1, Packaging="Tape and Reel", Power Rating=100mW, Radiation Hardening=No, REACH SVHC="No SVHC", RoHS Compliant=Yes, Series=TC33, Termination="Foot Print", Tolerance=25%, Weight=29.4mg, Width=0.118inch
U1: library part CMP-00370-134525155-1, "LM5148QRGYRQ1 Automotive, 80-V synchronous buck DC/DC controller with ultra-low IQ 24-VQFN -40 to 125", Case/Package=VQFN, Manufacturer Lifecycle Status=ACTIVE, Height=1mm, Length=5.5mm, Lifecycle Status=Production, NexarPartId=134525155, Number of Pins=24, Thickness=900µm, Width=3.5mm
U2: library part CMP-209535-000001-1, "LDO Voltage Regulators 1A, 3.3V", Dropout Voltage=1.1V, Manufacturer="Advanced Monolithic Systems", Max Junction Temp=+125°C, Max Power Dissipation=1.2W, Max Supply Voltage=15V, Nominal Supply Current=5mA, Output Current=1A, Output Voltage=3.3V, Package=AMS1117, Temperature="-40°C to +125°C", Temperature Range Low=-40°C, Automotive=No, Category=IC, ComponentLink2Description=Datasheet, ComponentLink2URL=http://www.advanced-monolithic.com/pdf/ds1117.pdf, Device Class L1="Integrated Circuits (ICs)", Device Class L2="Power Management ICs", Device Class L3="Voltage Regulators - Linear", Height=1.8mm, Ipc Land Pattern Name=SOT229P700X180-4, Lead Free=Yes, Manufacturer Part Number=AMS1117-3.3, Number Of Outputs=1, Octopart=https://octopart.com/ams1117-3.3-advanced+monolithic+systems-25899300, Output Type=Fixed, RoHS=TRUE, Standoff Height=0.64mm, Temperature Range High=+125°C
C1 C2 C3 C4 C5 C7 C8 C9 C10 C12 C13 C14 C15 C16 C17 C18 C19 C20 C21 C22 C23 C24 C25: SimulationGenericComponent=True
R3 R4 R5 R6 R7 R8 R9 R10 R11 R12 R13 R14 R15 R16 R19 R20 R21 R22 R23 R23 R24 R24 R25 R26 R28 R29 R30 R31: SimulationGenericComponent=True, TC1=0, TC2=0

## Via types
v1: diameter 25, hole 10, Top Layer to Bottom Layer, tented both sides, 266 vias
v2: diameter 25, hole 15, Top Layer to Bottom Layer, tented both sides, 26 vias
v3: diameter 40, hole 20, Top Layer to Bottom Layer, tented both sides, 2 vias

## Nets (pads, with @x,y where several pads share a name; then routed paths per layer and width w, separated by ;. In a path a pad name is that pad's centre, name@x,y a point inside that pad or via, vN(x,y) a via of type N, cw(c..) or ccw(c..) an arc to the next point about the centre after c; other vN are vias at no path point)
3V3: C13.2 C17.2 D1.1 D2.1 IC3.6 PROG2.1 U2.2 U2.4 | length 1398.4
  Top Layer w10: IC3.6 3121.5,2804.8 3136.69,2820 3163.6,2820 ; C17.2@3190.51,2820 3163.6,2820 ; D2.1 3160.69,2831.2 3160.69,2822.91 3163.6,2820
  Top Layer w15: PROG2.1@2760,2775 2815,2830 v2(2815,2833.01) ; v2(3060,2490) 3062.71,2490 3068.99,2483.72 3085.77,2483.72 D1.1 ; v2(3195,2840) 3196.91,2838.09 3196.91,2814.74 3195.77,2814.74 C17.2
  Bottom Layer w15: v2(2815,2833.01) 3016.07,2833.01 3018.08,2831.01 3073.72,2831.01 U2.4 ; v2(3060,2490) 3060,2544.22 U2.2@3080,2564.22 ; U2.2 3155,2640.28 3155,2749.72 U2.4 ; C13.2 3255,2785 3205,2835 3202.71,2835 3197.71,2840 3192.29,2840 3187.29,2845 3143.93,2845 3123.65,2824.72 U2.4
GND: C1.1 C3.1 C4.2 C6.2 C7.1 C8.1 C9.1 C10.2 C11.2 C12.1 C13.1 C14.1 C15.1 C16.1 C17.1 C19.1 C20.1 C21.1 C22.1 C24.1 C25.1 CP21.1 CP22.1 IC2.3 IC3.4 IC3.21 IC4.2 PROG2.2 R9.1 R11.2 R14.2 R15.2 R21.1 R23.1@1990.59,2240 R24.1@1990.59,2300 R29.2 R31.1 S_PAD2.1 S_PAD4.1 S_PAD6.1 U1.1 U1.7 U1.10 U1.16 U1.24 U1.25 U2.1 | length 522.1
  Top Layer w10: v1(3115,2740) 3115,2730.75 IC3.4 3179.8,2730.75 3181.81,2732.76 3193.27,2732.76 C17.1
  Top Layer w20: C8.1 v1@3135,1500 ; C7.1 3185,1520 S_PAD4.1
  Bottom Layer w10: U1.10 2141.1,2058.66 2177.44,2095 2197.13,2095 2160.79,2131.34 U1.16 ; U1.7 2200.16,2095 U1.25
  other v1: 1455,1255 2355,1255 2405,1255 2455,1255 2505,1255 2555,1255 2380,1305 2430,1305 1455,1355 2355,1355 2405,1355 2380,1405 2430,1405 3230,1405 3280,1405 1455,1455 2805,1455 2855,1455 2905,1455 2955,1455 3005,1455 3055,1455 3255,1455 3305,1455 2380,1505 2830,1505 2980,1505 3030,1505 3080,1505 3130,1505 1455,1555 2355,1555 2805,1555 3005,1555 3055,1555 3105,1555 2380,1605 2830,1605 2980,1605 3030,1605 3080,1605 3130,1605 1455,1655 1655,1655 2355,1655 1480,1705 1630,1705 1680,1705 1730,1705 1780,1705 1830,1705 1880,1705 1930,1705 3030,1705 3080,1705 3130,1705 3180,1705 3230,1705 3280,1705 1455,1755 1655,1755 1755,1755 1805,1755 1855,1755 1905,1755 1955,1755 3055,1755 3105,1755 3155,1755 3205,1755 3255,1755 3305,1755 1480,1805 1630,1805 1680,1805 1730,1805 1995,1805 3030,1805 3080,1805 3130,1805 3180,1805 3230,1805 3280,1805 1455,1855 1555,1855 1605,1855 1655,1855 1705,1855 3055,1855 3105,1855 3155,1855 3205,1855 3255,1855 3305,1855 1480,1905 1730,1905 1780,1905 1830,1905 1880,1905 1980,1905 3030,1905 3080,1905 3130,1905 3180,1905 3230,1905 3280,1905 1455,1955 1705,1955 1755,1955 1805,1955 1855,1955 2755,1955 2805,1955 2855,1955 2905,1955 2955,1955 3005,1955 3055,1955 3105,1955 3155,1955 3205,1955 3255,1955 3305,1955 1480,2005 1730,2005 2980,2005 3030,2005 3080,2005 3130,2005 3180,2005 3230,2005 3280,2005 1455,2055 1505,2055 1705,2055 3055,2055 3105,2055 3155,2055 3205,2055 3255,2055 3305,2055 1480,2105 1530,2105 1580,2105 1630,2105 1680,2105 1730,2105 1780,2105 3080,2105 3130,2105 3180,2105 3230,2105 3280,2105 1455,2155 1505,2155 1555,2155 1605,2155 1655,2155 1705,2155 1755,2155 3055,2155 3105,2155 3155,2155 3205,2155 3255,2155 3305,2155 1480,2205 1530,2205 1580,2205 1630,2205 3080,2205 3130,2205 3180,2205 3230,2205 3280,2205 1455,2255 1505,2255 1555,2255 1605,2255 3055,2255 3105,2255 3155,2255 3205,2255 3255,2255 3305,2255 1480,2305 1530,2305 1580,2305 3080,2305 3130,2305 3180,2305 3230,2305 3280,2305 1455,2355 1755,2355 1455,2455 1605,2455 2005,2455 2155,2455 2305,2455 2355,2455 2405,2455 2655,2455 2805,2455 3205,2455 3255,2455 3305,2455 1980,2505 2480,2505 2630,2505 3280,2505 1555,2555 2005,2555 2455,2555 2655,2555 1480,2605 1780,2605 1980,2605 2480,2605 2830,2605 3190,2605 2005,2655 2455,2655 2440,2695 3075,2700 1580,2705 1980,2705 2130,2705 2480,2705 2005,2755 1480,2805 1830,2805 1980,2805 2430,2805 2480,2805 2630,2805 2680,2805 1505,2855 1555,2855 2005,2855 2455,2855 2605,2855 2655,2855 2705,2855 2755,2860 1480,2905 1530,2905 1580,2905 1630,2905 1680,2905 1730,2905 1780,2905 1830,2905 1880,2905 1930,2905 1980,2905 2130,2905 2180,2905 2430,2905 2480,2905 2630,2905 2680,2905 2730,2905 2780,2905 2830,2905
LED: IC3.17 R20.1 | length 87.4
  Top Layer w8: R20.1 3046.96,2597.47 3046.96,2606.96 3052,2612 3052,2615.38 3074.25,2637.64 IC3.17
NetC1_2: C1.2 C3.2 R4.2 U1.9 | length 746.9
  Int2 w10: v2(1975,1950) 1975,1953.36 1985,1963.36 1985,2030 1950,2065 1950,2300 1975.51,2325.51 v2(2070,2325.51)
  Bottom Layer w10: v2(1975,1950) 1979.06,1950 1984.57,1955.51 C1.2 2016.87,1953.65 2068.14,1953.65 C3.2 ; R4.2 v2(2070,2325.51) ; C3.2@2080.44,1965.95 2106.73,1965.95 2160.79,2020 U1.9
NetC2_1: C2.1 IC1.3 IC2.2 L1.1 R5.1 U1.14 | length 666.8
  Top Layer w10: v2(2090,2190) 2090,2186.64 2100,2176.64 2100,2128.86 IC2.2 ; 2730,2045 2740,2035 2740,2024.06 2737.87,2021.93 2737.87,2002.87 v2(2735,2000)
  Bottom Layer w10: C2.1 2072.92,2245 2078.78,2239.14 2078.78,2205.28 2090,2194.06 v2(2090,2190) 2091.38,2190 2114.61,2166.77 U1.14@2121.34,2166.77 ; R5.1 2646.9,2063.61 2666.39,2063.61 2730,2000 v2(2735,2000)
NetC2_2: C2.2 U1.15 | length 99.8
  Bottom Layer w10: C2.2 2111.69,2238.82 2111.69,2220 2141.1,2190.59 U1.15
NetC4_1: C4.1 R19.2 U1.8 U1.18 | length 1180.3
  Top Layer w15: v2(2000,1850) 1968.79,1850 1915,1903.79 1915,2170 1980,2235 2209.7,2235 2223.18,2221.52 v2(2223.48,2221.52)
  Bottom Layer w15: v2(2000,1850) 2002.71,1850 2007.71,1855 2124.49,1855 C4.1 2130,1945 2180.47,1995.47 U1.8 ; R19.2 R19.2@2172.5,2244.27 ; R19.2@2172.5,2251.77 2179.23,2245.04 2179.23,2228.7 2198.07,2209.86 ; U1.18 2198.07,2162.05 2198.07,2209.86 ; v2(2223.48,2221.52) 2221.57,2219.6 2207.81,2219.6 2198.07,2209.86
NetC5_1: C5.1 L1.2 R1.1 R5.2 U1.20 | length 667.6
  Top Layer w10: v2(2680,1930) 2681.88,1928.12 2681.88,1897.18 2689.06,1890 2690,1890
  Bottom Layer w10: U1.20 2239.53,2184.53 2260,2205 2385,2205 2515,2075 2574.49,2075 2591.22,2058.27 2591.22,2048.78 2628.78,2011.22 2628.78,1991.73 C5.1 ; C5.1@2641.9,1978.61 2666.39,1978.61 2680,1965 v2(2680,1930)
NetC9_2: C9.2 R10.2 U1.5 | length 207
  Bottom Layer w8: U1.5 2239.53,1974.53 2210,1945 C9.2 2210.51,1896.02 R10.2
NetC10_1: C10.1 R13.1 | length 65
  Bottom Layer w8: C10.1 R13.1
NetC12_2: C12.2 R19.1 S_PAD5.1 U2.3 | length 1116.8
  Bottom Layer w15: R19.1 2174.23,2314.52 2182.54,2314.52 2183.02,2315 2675,2315 2710,2350 2710,2450 2825.28,2565.28 2880,2565.28 ; S_PAD5.1 2880,2510 2880,2565.28 ; C12.2 2905,2565.28 ; U2.3 2905,2565.28 ; 2880,2565.28 2905,2565.28
NetC14_2: C14.2 C15.2 Q1.1 R22.1 | length 273.7
  Bottom Layer w10: C14.2 1743.82,2295 1779.41,2259.41 ; C15.2 1750,2230 1779.41,2259.41 ; Q1.1 1805,2249.41 R22.1 1779.41,2259.41
NetC18_1: C18.1 IC4.6 L2.1 | length 244.7
  Top Layer w10: C18.1 1813.67,2655 1820,2648.67
  Top Layer w25: L2.1 1762.5,2717.5 1792.5,2717.5 1820,2690 1820,2648.67 1820,2607.34 1832.93,2594.41 1832.93,2592.7 1833.23,2592.4 IC4.6@1834.13,2592.4
NetC18_2: C18.2 IC4.1 | length 67.3
  Top Layer w10: C18.2 1718.13,2651.36 1718.13,2600.14 IC4.1@1725.87,2592.4
NetC19_2: C19.2 C20.2 C21.2 C22.2 CP19.1 IC4.5 R25.2 | length 523.3
  Top Layer w10: R25.2 1850,2460 1893.68,2503.68
  Top Layer w25: IC4.5@1834.13,2555 1834.43,2554.7 1868.05,2554.7 ; C22.2 C19.2 C21.2 C20.2 1878.72,2650.77 1878.72,2518.64 1893.68,2503.68 1930,2467.36 CP19.1
NetC23_1: C23.1 R26.1 R27.2 R28.1 R30.2 | length 336.9
  Top Layer w10: R27.2 1511.5,2549.49 1511.5,2564.49 1561.13,2614.13 1609.64,2614.13 R26.1 C23.1@1645,2614.49 ; R28.1 1648.78,2549.29 1648.78,2558.27 R30.2 1660.51,2613.98 C23.1 C23.1@1645,2614.49 ; C23.1@1652.5,2606.99 C23.1@1645,2614.49
NetC23_2: C23.2 C24.2 C25.2 CP20.1 L2.2 R26.2 R27.3 | length 571
  Top Layer w10: R27.3 1460,2665.32 1460,2734.49 ; R26.2 1610,2735 C24.2@1625,2750 ; C24.2@1615,2740 C24.2@1625,2750 ; R26.2@1620,2675.51 C23.2 ; C24.2@1625,2750 C24.2 C24.2@1625,2750
  Top Layer w25: CP20.1 1541.12,2734.74 1546.63,2740.26 1555.77,2740.26 C25.2 1563.72,2740.77 1614.23,2740.77 C24.2@1615,2740 ; C24.2 1637.5,2757.5 1657.5,2757.5 1717.5,2817.5 1717.5,2827.5 1735,2845 L2.2
NetCP1_1: CP1.1 PROG1.1 | length 163
  Top Layer w15: v2(2185.94,2840.32) 2223.99,2840.32 2264.31,2800 PROG1.1
  Bottom Layer w15: v2(2185.94,2840.32) 2225.32,2840.32 CP1.1
NetCP2_1: CP2.1 PROG1.2 | length 273.6
  Top Layer w8: PROG1.2 PROG1.2@2351.5,2738.5
  Top Layer w15: v2(2165.35,2706.69) 2203.66,2745 2342.76,2745 PROG1.2
  Bottom Layer w15: v2(2165.35,2706.69) CP2.1
NetCP3_1: CP3.1 PROG1.4 | length 248
  Top Layer w15: v2(2165.35,2657.48) 2168.06,2657.48 2190.54,2635 PROG1.4
  Bottom Layer w15: CP3.1 v2(2165.35,2657.48)
NetCP4_1: CP4.1 PROG1.3 | length 298.3
  Top Layer w15: PROG1.3 2387.29,2690 2397.29,2680 v2(2400,2680)
  Bottom Layer w15: CP4.1 2250,2685 2392.29,2685 2397.29,2680 v2(2400,2680)
NetCP5_1: CP5.1 PROG1.5 | length 159
  Top Layer w15: v2(2190,2545) 2224.93,2545 2259.93,2580 PROG1.5
  Bottom Layer w15: v2(2190,2545) 2210,2545 CP5.1
NetCP6_1: CP6.1 IC3.18 | length 210.3
  Top Layer w8: CP6.1 3023.5,2513.5 3023.5,2518.5 3065,2560 3065,2610 3090,2635 IC3.18
NetCP7_1: CP7.1 IC3.16 | length 198.7
  Top Layer w8: IC3.16@3058.44,2652.19 3058.5,2652.25 IC3.16
  Top Layer w10: CP7.1 3022.19,2652.19 IC3.16@3058.44,2652.19
NetCP8_1: CP8.1 IC3.1 | length 198.6
  Top Layer w10: IC3.1 3158.74,2683.5 3159.8,2682.44 3159.8,2672.76 3220,2612.56 CP8.1
NetCP9_1: CP9.1 IC3.2 | length 170
  Top Layer w10: IC3.2 3185.75,2699.25 CP9.1
NetCP10_1: CP10.1 IC3.14 | length 176.7
  Top Layer w10: CP10.1 2891.64,2631.64 2926.64,2631.64 2994.25,2699.25 IC3.14
NetCP11_1: CP11.1 IC3.3 | length 141.3
  Top Layer w10: IC3.3 3255,2715 CP11.1
NetCP12_1: CP12.1 IC3.13 | length 145.9
  Top Layer w10: CP12.1 IC3.13
NetCP13_1: CP13.1 IC3.12 | length 174.6
  Top Layer w10: CP13.1 2954.25,2730.75 IC3.12
NetCP14_1: CP14.1 IC3.5 | length 152.3
  Top Layer w10: IC3.5 3152.87,2746.5 3153.94,2747.56 3153.94,2763.94 3165,2775 CP14.1
NetCP15_1: CP15.1 IC3.11 | length 203
  Top Layer w10: CP15.1 2916.64,2878.36 2916.64,2848.36 3018.5,2746.5 IC3.11
NetCP16_1: CP16.1 IC3.7 | length 170.5
  Top Layer w10: IC3.7 3105.75,2810.75 3162.5,2867.5 3162.5,2917.5 CP16.1
NetCP17_1: CP17.1 IC3.9 | length 172.5
  Top Layer w10: CP17.1 3015,2900 3015,2842.99 3039.9,2818.09 3048.29,2818.09 3073.19,2793.2 IC3.9@3073.19,2784.8
NetCP18_1: CP18.1 IC3.8 | length 150.1
  Top Layer w10: CP18.1 3090,2910 IC3.8
NetD1_2: D1.2 R20.2 | length 49.7
  Top Layer w10: D1.2 3095,2584.49 R20.2
NetD2_2: D2.2 R21.2 | length 60
  Top Layer w10: D2.2 R21.2
NetIC1_1: IC1.1 U1.13 | length 1097.9
  Int2 w20: v3(2055,2165.47) 2058.83,2161.65 2078.35,2161.65 2465,1775 2465,1445 IC1.1@2555,1355
  Bottom Layer w20: v3(2055,2165.47) 2055,2163.28 2093.75,2124.53 U1.13
NetIC2_1: IC2.1 U1.11 | length 342.9
  Int2 w20: IC2.1@1790,2020 1805,2005 v3(1955,2005)
  Bottom Layer w20: v3(1955,2005) 1980.04,2030.04 2116.34,2030.04
NetIC3_19: IC3.19 R4.1 U1.17 | length 1470.6
  Top Layer w8: IC3.19 3105.81,2655.88 3105.81,2635.89 3140,2601.7 v2(3140,2490)
  Bottom Layer w8: R4.1 2134.78,2270.73 ; 2135.35,2270.17 2219.61,2270.17 2234.44,2285 2318.91,2285 2319.35,2284.56 2907.91,2284.56 3007.5,2384.15 3007.5,2402.53 3007.5,2417.5 3044.62,2454.62 3114.62,2454.62 3136.75,2476.75 3136.75,2486.75 v2(3140,2490) ; 2137.64,2269.37 2139.27,2268.8 2139.27,2264.73 2139.27,2223.81 2144.54,2218.54 2144.54,2215.46 2180.47,2179.53 U1.17
NetIC3_20: IC3.20 R16.1 U1.19 | length 1805.7
  Top Layer w8: IC3.20 3121.5,2643.5 3165,2600 3165,2460 v2(3150,2445)
  Int2 w10: v2(1990,2185) 1990,2189.06 1996.95,2196 1996.95,2196.95 2070,2270 2299.44,2270 2305.94,2263.5 v2(2310,2263.5)
  Bottom Layer w10: v2(1990,2185) 1990,2109.49 R16.1 ; U1.19@2219.76,2166.77 2219.76,2168.66 2219.17,2169.26 2219.17,2185.38 2253.79,2220 2288.28,2220 2309.14,2240.86 ; v2(2310,2263.5) 2309.14,2262.64 2309.14,2240.86 ; 3056.97,2436.98 3035,2415.01 3035,2335 2940,2240 2310,2240 2309.14,2240.86 ; 3056.98,2436.98 3060,2440 3136.64,2440 3138.77,2442.13 3147.13,2442.13 v2(3150,2445)
NetIC4_3: IC4.3 R28.2 | length 51.4
  Top Layer w10: R28.2 1723.27,2515 IC4.3@1725.87,2517.6
NetIC4_4: IC4.4 R25.1 R29.1 | length 157.2
  Top Layer w10: R29.1 R25.1 1768.56,2469.07 1768.56,2485.61 1800.55,2517.6 IC4.4@1834.13,2517.6
NetQ1_2: Q1.2 R23.2@1939.41,2240 R24.2@1939.41,2300 | length 184.5
  Bottom Layer w10: Q1.2 1883.14,2191.67 1926.61,2191.67 1932.47,2197.52 1932.47,2233.06 1939.41,2240 1939.41,2241.97 1956.14,2258.7 1956.14,2298.27 1941.14,2298.27 R24.2@1939.41,2300
NetQ1_3: Q1.3 R7.1 R9.2 R23.1@2034.49,1500 R24.1@2034.49,1565 U1.6 | length 1248.3
  Bottom Layer w10: Q1.3 1842.4,2095.59 1849.21,2088.78 1884.88,2088.78 1916.04,2057.62 1916.04,1983.96 1950,1950 1950,1800 2065,1685 ; R9.2 R7.1 2034.49,1500 2034.49,1565 2065,1595.51 2065,1685 ; U1.6 2219.84,1989.84 2170,1940 2170,1790 2065,1685
NetR1_2: R1.2 R2.1 | length 50
  Top Layer w100: R2.1@2670,1430 R1.2@2670,1480
NetR3_1: R3.1 R6.2 | length 49
  Bottom Layer w10: R6.2 R3.1
NetR6_1: R6.1 R7.2 R23.2@2095.51,1500 R24.2@2095.51,1565 | length 174
  Bottom Layer w10: R24.2@2095.51,1565 2095.51,1500 R7.2 R6.1
NetR8_1: R8.1 R11.1 | length 54.7
  Bottom Layer w8: R11.1 2400.51,1771.02 R8.1
NetR8_2: R8.2 U1.4 | length 238.3
  Bottom Layer w8: U1.4 2260,2029.25 2260,1995 2315,1940 2315,1849.49 R8.2
NetR10_1: R10.1 R13.2 | length 54.5
  Bottom Layer w8: R13.2 R10.1
NetR12_1: R12.1 U1.3 | length 159.7
  Bottom Layer w8: U1.3 2279.82,2029.12 2279.82,2015.18 2350,1945 2350,1900.51 R12.1
NetR12_2: R12.2 R14.1 R15.1 | length 134
  Bottom Layer w8: R12.2 R14.1 R15.1
NetR30_1: R30.1 R31.2 | length 151.4
  Top Layer w10: R31.2 1587.76,2548.27 1587.76,2558.27 R30.1
SWIO: IC3.15 PROG2.4 | length 938.5
  Top Layer w10: 2420,2610 2420,2520 2500,2440 2570,2440 2605,2475 2605,2620 2620.63,2635.63 2655.63,2635.63 2680,2660 2702.5,2637.5 2822.5,2637.5 v2(2825,2640) ; v2(2990,2655) 3018.5,2683.5 IC3.15
  Int1 w10: v2(2825,2640) 2840,2655 v2(2990,2655)
VIN: C6.1 IC1.2 R16.2 S_PAD1.1 U1.12 | length 885.6
  Top Layer w10: v2(1970,1695) 1970,1521.14 IC1.2
  Int2 w10: v2(1970,1695) 1971.95,1696.95 1971.95,1711.95 2070,1810 2070,2005 2070.86,2005.86 2070.86,2014.14 2020,2065 v2(1990,2065)
  Bottom Layer w10: v2(1990,2065) 2055,2065 2055.51,2065.51 ; R16.2 2055.51,2065.51 ; U1.12 2105.63,2065.51 2055.51,2065.51
VOUT: C5.2 C7.2 C8.2 C11.1 R2.2 R3.2 S_PAD3.1 U1.21 | length 1855.1
  Top Layer w20: 2755,1280 v2(2755,1390) ; 3135,1350 C8.2 ; C7.2 3185,1335 S_PAD3.1
  Bottom Layer w10: U1.21 2259.21,2181.64 2265.07,2187.5 2300.76,2187.5 2413.42,2074.85 2413.42,2071.58 ; 2505.08,1982.5 2576.99,1982.5 C5.2
  Bottom Layer w15: R3.2 2755,1440
  Bottom Layer w20: 2413.42,2074.85 2504.13,1984.13 ; 2505.08,1982.5 2645.51,1842.07 2645.51,1759.49 2755,1650 2755,1440 2755,1391.35 v2(2755,1390)
VREG_PWM: C16.2 IC3.10 R22.2 | length 1628.7
  Top Layer w10: v2(3030,2780) IC3.10@3057.44,2780
  Int1 w10: v2(2824.13,2703.43) 2821.57,2703.43 2820,2705 2912.5,2797.5 3012.5,2797.5 v2(3030,2780)
  Bottom Layer w10: R22.2 1816.97,2310.59 1835.53,2329.15 1839.15,2329.15 1870.59,2360.59 1880.59,2360.59 ; C16.2 1880,2360 1880.59,2360.59 ; v2(2824.13,2703.43) 2690,2569.3 2690,2375 2675.59,2360.59 1880.59,2360.59
pads on no net: PROG2.3 PROG2.5 R27.1 U1.2 U1.22 U1.23

## Polygon pours and split planes (outlines as drawn)
GND on Top Layer "NONET_L-01_P-001" (solid, remove dead copper, pour order 14): 1400,2965 3350,2965 3350,2400 1400,2400
VIN on Top Layer "NONET_L-01_P-001" (solid, pour order 3): 1810,1235 1515,1235 cw(c1510,1255) 1490,1250 1490,1580 cw(c1535,1575) 1540,1620 1645,1620 ccw(c1645,1665) 1690,1665 cw(c1700,1665) 1700,1675 1810,1675
GND on Top Layer "NONET_L-01_P-001" (solid, pour order 1): 1503.78,2024.78 cw(c1523.78,2024.78) 1523.78,2044.78 1658.78,2044.78 cw(c1658.78,2024.78) 1678.78,2024.78 1678.78,1954.78 ccw(c1773.78,1954.78) 1773.78,1859.78 1863.78,1859.78 cw(c1863.78,1849.78) 1873.78,1849.78 1873.78,1779.78 cw(c1863.78,1779.78) 1863.78,1769.78 1733.78,1769.78 ccw(c1726.28,1687.28) 1643.78,1694.78 cw(c1598.78,1699.78) 1593.78,1654.78 1528.78,1654.78 cw(c1528.78,1679.78) 1503.78,1679.78
NetC2_1 on Top Layer "NONET_L-01_P-001" (solid, pour order 5): 2309.77,1695 cw(c2310,1600) 2405,1600 2405,1540 ccw(c2450,1540) 2450,1495 2560,1495 ccw(c2560,1535) 2600,1535 2600,1965 cw(c2650,1965) 2650,2015 2920,2015 ccw(c2920,2115) 3020,2115 3020,2275 ccw(c2945,2275) 2945,2350 2490,2350 ccw(c2549.31,2020.05) 2231.38,2126.38 cw(c2226.76,2120.69) 2231.38,2115 ccw(c2427.53,1939.62) 2167.8,1897.47
NetC5_1 on Top Layer "NONET_L-01_P-001" (solid, pour order 7): 2689.28,1907.58 ccw(c2689.28,1837.58) 2619.28,1837.58 2619.28,1577.58 ccw(c2634.28,1577.58) 2634.28,1562.58 2714.28,1562.58 ccw(c2714.28,1599.15) 2750.76,1596.53 cw(c2819.13,1604.22) 2808.25,1672.16 2957.71,1672.16 ccw(c2957.71,1714.15) 2999.28,1708.21 2999.28,1847.58 ccw(c2939.28,1847.58) 2939.28,1907.58
VOUT on Top Layer "NONET_L-01_P-001" (solid, pour order 10): 3312.47,1363.33 ccw(c3302.47,1363.33) 3302.47,1373.33 3117.47,1373.33 cw(c3117.47,1388.33) 3102.47,1388.33 ccw(c3082.47,1388.33) 3082.47,1408.33 2867.47,1408.33 ccw(c2867.47,1383.33) 2842.47,1383.33 2842.47,1353.33 cw(c2822.47,1353.33) 2822.47,1333.33 2637.47,1333.33 ccw(c2637.47,1308.33) 2612.47,1308.33 2612.47,1228.33 ccw(c2634.97,1225.83) 2632.47,1203.33 3292.47,1203.33 ccw(c3292.47,1223.33) 3312.47,1223.33
GND on Top Layer "NONET_L-01_P-001" (solid, pour order 11): 3207.5,1650 2892.5,1650 ccw(c2892.5,1620) 2862.5,1620 2862.5,1505 ccw(c2887.5,1505) 2887.5,1480 3302.5,1480 ccw(c3302.5,1495) 3317.5,1495 3317.5,1625 ccw(c3292.5,1625) 3292.5,1650
GND on Int1 "NONET_L-01_P-001" (solid, pour order 12): 1400,2965 3350,2965 3350,1175 1400,1175
GND on Int2 "NONET_L-01_P-001" (solid, pour order 15): 1400,2965 3350,2965 3350,1175 1400,1175
GND on Bottom Layer "NONET_L-01_P-001" (solid, remove dead copper, pour order 16): 1400,2965 3350,2965 3350,1175 1400,1175

## Keep-outs
Keep-Out Layer:
  region: 2403.92,2846.52 cw(c2362.2,2850.32) 2404.09,2850.32 cw(c2401.57,2850.32) 2399.06,2850.32 ccw(c2362.2,2850.32) 2398.91,2846.98 cw(c2401.41,2846.75)
  lines w5: 1400,1175 1400,2965 1887.5,2965 2862.5,2965 3350,2965 3350,1175 1400,1175 ; 1453,2400 ccw(c1475.5,2400) 1475.5,2377.5 1695.5,2377.5 ccw(c1695.5,2400) 1718,2400 ccw(c1695.5,2400) 1695.5,2422.5 1475.5,2422.5 ccw(c1475.5,2400) 1453,2400 ; 1772.5,2400 cw(c1795,2400) 1795,2422.5 2015,2422.5 cw(c2015,2400) 2037.5,2400 cw(c2015,2400) 2015,2377.5 1795,2377.5 cw(c1795,2400) 1772.5,2400 ; 2047.5,2465 ccw(c2070,2465) 2070,2442.5 ccw(c2070,2465) 2092.5,2465 2092.5,2685 ccw(c2070,2685) 2070,2707.5 ccw(c2070,2685) 2047.5,2685 2047.5,2465 ; 2047.5,2775 ccw(c2070,2775) 2070,2752.5 ccw(c2070,2775) 2092.5,2775 2092.5,2910 ccw(c2070,2910) 2070,2932.5 ccw(c2070,2910) 2047.5,2910 2047.5,2775 ; 2092.5,2400 cw(c2115,2400) 2115,2422.5 2335,2422.5 cw(c2335,2400) 2357.5,2400 cw(c2335,2400) 2335,2377.5 2115,2377.5 cw(c2115,2400) 2092.5,2400 ; 2401.41,2523.25 cw(c2401.41,2523.09) 2401.57,2523.09 2401.57,2520.01 cw(c2362.2,2519.68) 2401.41,2523.25 ; 2407.5,2400 cw(c2430,2400) 2430,2422.5 2650,2422.5 cw(c2650,2400) 2672.5,2400 cw(c2650,2400) 2650,2377.5 2430,2377.5 cw(c2430,2400) 2407.5,2400 ; 2517.5,2480 ccw(c2540,2480) 2540,2457.5 ccw(c2540,2480) 2562.5,2480 2562.5,2700 ccw(c2540,2700) 2540,2722.5 ccw(c2540,2700) 2517.5,2700 2517.5,2480 ; 2517.5,2775 ccw(c2540,2775) 2540,2752.5 ccw(c2540,2775) 2562.5,2775 2562.5,2910 ccw(c2540,2910) 2540,2932.5 ccw(c2540,2910) 2517.5,2910 2517.5,2775 ; 2727.5,2400 cw(c2750,2400) 2750,2422.5 2970,2422.5 cw(c2970,2400) 2992.5,2400 cw(c2970,2400) 2970,2377.5 2750,2377.5 cw(c2750,2400) 2727.5,2400 ; 3052.5,2400 cw(c3075,2400) 3075,2422.5 3295,2422.5 cw(c3295,2400) 3317.5,2400 cw(c3295,2400) 3295,2377.5 3075,2377.5 cw(c3075,2400) 3052.5,2400

## Silkscreen, mask and mechanical layers (free items; w line width, h text height)
Top Overlay:
  text "-IN+" at 1471,2829 h30 r270
  text "+OUT-" at 1904,2456 h30 r90
Bottom Overlay:
  lines w15: 1860,1385 2365,1385 2365,1610 1860,1610 1860,1385 ; 1955,2055 1955,2150 2085,2150 2085,2055 1955,2055
  text "HARD EN" at 1980,2050 h20 r180
  text "10K" at 1931,1554 h30 r270
  text "VOUT DIVIDER" at 2380,1400 h30 r270
  text "VOUT" at 2306,1354 h30 r270
  text "GND" at 1871,1349 h30 r270